# EAGLE board pihat-v2 (EAGLE 8.7.1)
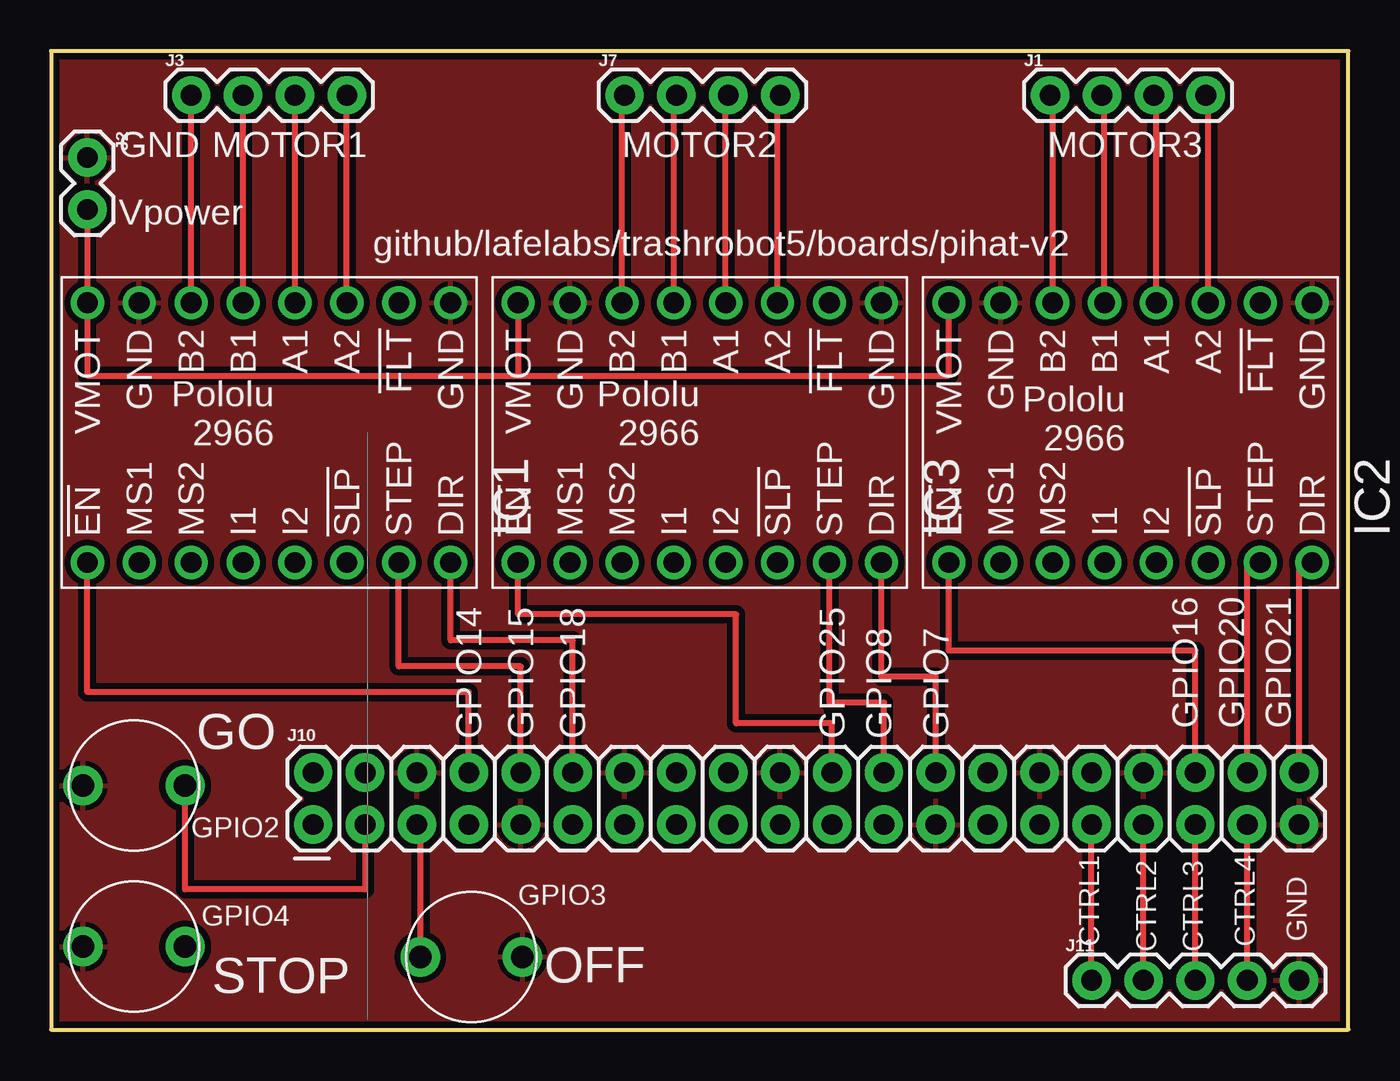
[diagram p0: board, top side]
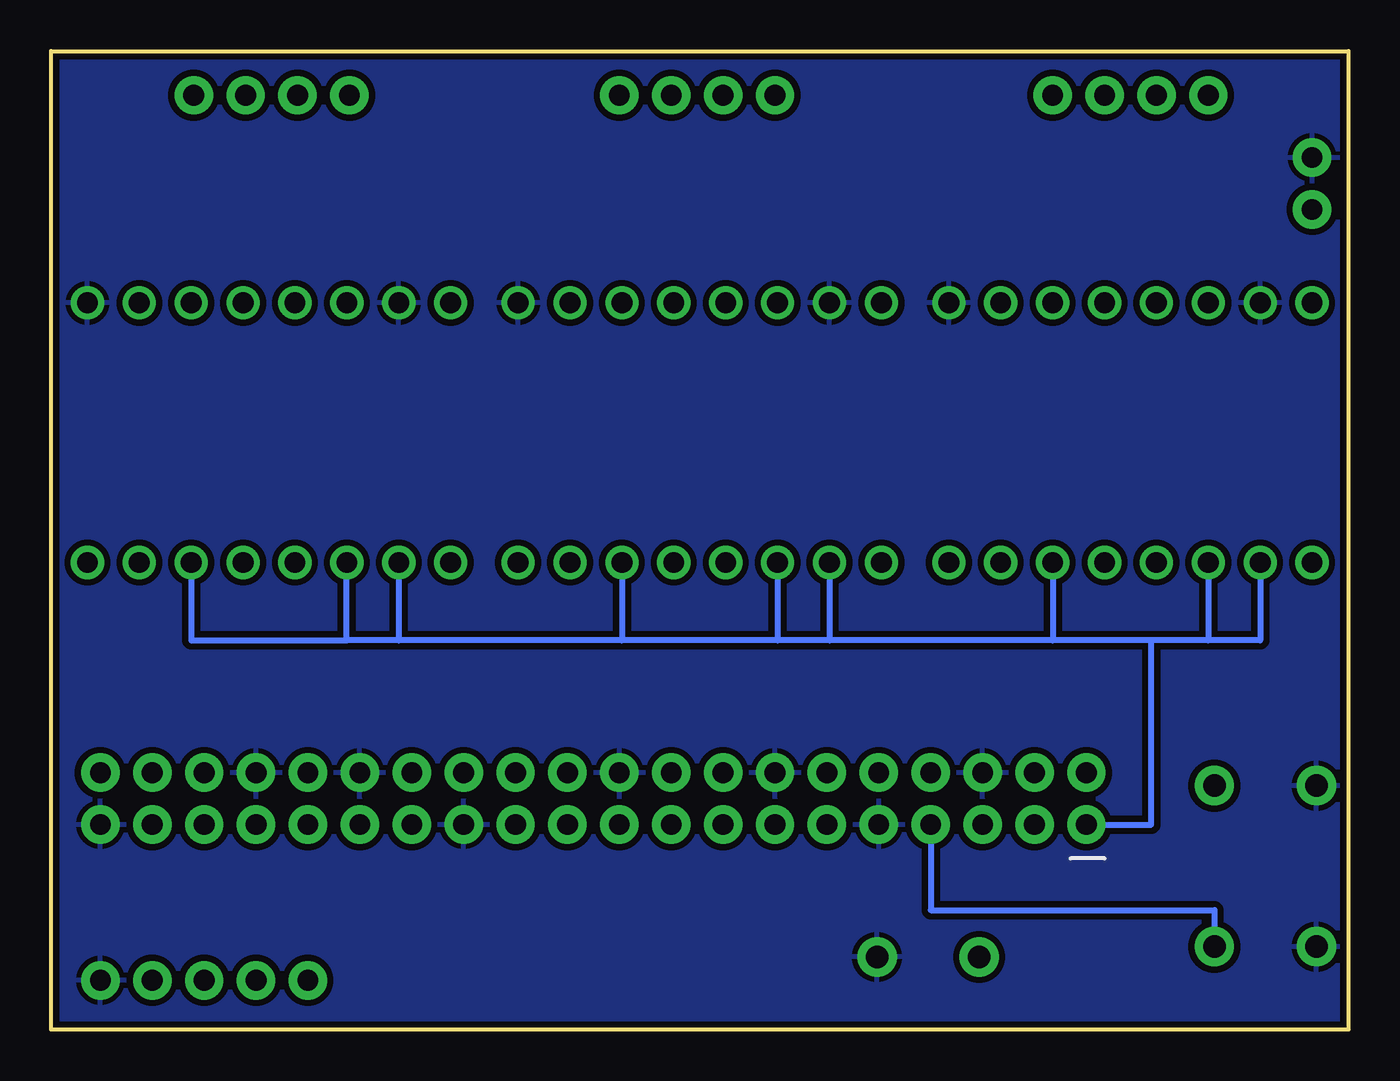
[diagram p1: board, bottom side, seen from below]

Size 63.5 x 47.88 mm. Coordinates in mm from the lower left corner, seen from the top.
Outline: 0,47.88 0,0 63.5,0 63.5,47.88 0,47.88
Copper layers (1*16): Top 0.035mm / dielectric 1.5mm / Bottom 0.035mm
Design rules "default": minimum track width 8mil, minimum drill 20mil, track to track 8mil, track to pad 8mil, pad to pad 8mil, via to via 8mil, smd to smd 8mil, copper to edge 10mil, drill to drill 8mil, minimum pad ring 12mil, minimum via ring 10mil, stop-mask expansion 4mil, vias tented up to drill 25mil, thermal gap 10mil
Net classes: 0 Default: width 0.178 mm; 1 vcc: width 0.178 mm

## Footprints (pad centres in the part's own frame; a part is rotated, then mirrored left to right if it is on the bottom)
MP6500 = drill 1.016: 1 -6.35,8.89; 2 -6.35,6.35; 3 -6.35,3.81; 4 -6.35,1.27; 5 -6.35,-1.27; 6 -6.35,-3.81; 7 -6.35,-6.35; 8 -6.35,-8.89; 9 6.35,-8.89; 10 6.35,-6.35; 11 6.35,-3.81; 12 6.35,-1.27; 13 6.35,1.27; 14 6.35,3.81; 15 6.35,6.35; 16 6.35,8.89
1X04 = drill 1.016 pad 1.88: 1 0,0; 2 2.54,0; 3 5.08,0; 4 7.62,0
1X02 = drill 1.016 pad 1.88: 1 0,0; 2 2.54,0
2X20 = drill 1.016 pad 1.88: 1 0,0; 2 0,2.54; 3 2.54,0; 4 2.54,2.54; 5 5.08,0; 6 5.08,2.54; 7 7.62,0; 8 7.62,2.54; 9 10.16,0; 10 10.16,2.54; 11 12.7,0; 12 12.7,2.54; 13 15.24,0; 14 15.24,2.54; 15 17.78,0; 16 17.78,2.54; 17 20.32,0; 18 20.32,2.54; 19 22.86,0; 20 22.86,2.54; 21 25.4,0; 22 25.4,2.54; 23 27.94,0; 24 27.94,2.54; 25 30.48,0; 26 30.48,2.54; 27 33.02,0; 28 33.02,2.54; 29 35.56,0; 30 35.56,2.54; 31 38.1,0; 32 38.1,2.54; 33 40.64,0; 34 40.64,2.54; 35 43.18,0; 36 43.18,2.54; 37 45.72,0; 38 45.72,2.54; 39 48.26,0; 40 48.26,2.54
1X05 = drill 1.016 pad 1.88: 1 0,0; 2 2.54,0; 3 5.08,0; 4 7.62,0; 5 10.16,0
BUTTON = drill 1.1 pad 1.93: P$1 -2.499,0; P$2 2.499,0

## Placement (x,y rotation side)
IC1  2967-MP6500  [MP6500]  10.67,29.21 90 top
IC2  2967-MP6500  [MP6500]  52.83,29.21 90 top
IC3  2967-MP6500  [MP6500]  31.75,29.21 90 top
J1  [1X04]  48.9,45.72 0 top
J2  [1X02]  1.78,42.67 270 top
J3  [1X04]  6.86,45.72 0 top
J7  [1X04]  28.07,45.72 0 top
J10  RASPBERRYPI-40-PIN-GPIO_PTH_NO_SHROUD  [2X20]  12.83,10.03 0 top
J11  [1X05]  50.93,2.41 0 top
U$1  BUTTON  [BUTTON]  4.06,4.06 180 top
U$4  BUTTON  [BUTTON]  4.06,11.94 180 top
U$5  BUTTON  [BUTTON]  20.57,3.56 0 top

## Library data of the parts
IC1-IC3 = pololu-stepper-driver
J1 J3 J7 = SparkFun-Connectors; PROD_ID: CONN-09696
J2 J10 J11 = SparkFun-Connectors
U$1 U$4 U$5 = spietz-library-2

## Nets
3.3V: IC1.2 IC1.3 IC1.6 IC2.2 IC2.3 IC2.6 IC3.2 IC3.3 IC3.6 J10.1
12V: IC1.16 IC2.16 IC3.16 J2.2
CONTROL1: J10.31 J11.1
CONTROL2: J10.33 J11.2
CONTROL3: J10.35 J11.3
CONTROL4: J10.37 J11.4
D5: J10.29
D12: J10.32
D17: J10.11
D22: J10.15
D23: J10.16
D24: J10.18
D27: J10.13
DIR1: IC1.8 J10.12
DIR2: IC3.8 J10.26
DIR3: IC2.8 J10.40
EN1: IC1.1 J10.8
EN2: IC3.1 J10.22
EN3: IC2.1 J10.36
GND [vcc]: IC1.9 IC1.15 IC2.9 IC2.15 IC3.9 IC3.15 J2.1 J10.6 J10.9 J10.14 J10.20 J10.25 J10.30 J10.34 J10.39 J11.5 U$1.P$2 U$4.P$2 U$5.P$2
GO-GPIO2: J10.3 U$4.P$1
GPIO1: J10.28
ID_SDA: J10.27
MISO: J10.21
MOSI: J10.19
N$1: IC3.14 J7.1
N$4: IC3.13 J7.2
N$5: IC1.14 J3.1
N$6: IC1.13 J3.2
N$7: IC1.12 J3.3
N$8: IC1.11 J3.4
N$9: IC2.14 J1.1
N$10: IC2.13 J1.2
N$11: IC2.12 J1.3
N$12: IC2.11 J1.4
N$13: IC3.12 J7.3
N$14: IC3.11 J7.4
N$15: J10.17
N$16: J10.2
N$17: J10.4
OFF-GPIO3: J10.5 U$5.P$1
SCK: J10.23
STEP1: IC1.7 J10.10
STEP2: IC3.7 J10.24
STEP3: IC2.7 J10.38
STOP: J10.7 U$1.P$1

## Tracks (layer width: path | path; a pad name or v marks a point on that pad's centre or on a via)
3.3V
  Bottom 0.305: IC2.6 56.64,19.05 49.02,19.05 | 49.02,19.05 IC2.3 | IC2.2 46.48,19.05 | 46.48,19.05 49.02,19.05 | IC3.6 35.56,19.05 | 35.56,19.05 46.48,19.05 | IC3.3 27.94,19.05 | 27.94,19.05 35.56,19.05 | IC3.2 25.4,19.05 | 25.4,19.05 27.94,19.05 | IC1.6 14.48,19.05 | 14.48,19.05 25.4,19.05 | IC1.3 6.86,19.05 | 6.86,19.05 9.65,19.05 | 9.65,19.05 14.48,19.05 | IC1.2 4.32,19.05 6.86,19.05 | J10.1 9.65,10.03 9.65,19.05
12V
  Top 0.305: J2.2 IC1.16 1.78,32 22.86,32 | 22.86,32 43.94,32 IC2.16 | IC3.16 22.86,32
CONTROL1
  Top 0.305: J11.1 J10.31
CONTROL2
  Top 0.305: J11.2 J10.33
CONTROL3
  Top 0.305: J11.3 J10.35
CONTROL4
  Top 0.305: J11.4 J10.37
DIR1
  Top 0.305: J10.12 25.53,19.05 19.56,19.05 IC1.8
DIR2
  Top 0.305: J10.26 43.31,17.27 40.64,17.27 IC3.8
DIR3
  Top 0.305: J10.40 61.09,22.86 IC2.8
EN1
  Top 0.305: J10.8 20.45,16.51 1.78,16.51 IC1.1
EN2
  Top 0.305: J10.22 38.23,14.99 33.53,14.99 33.53,20.32 22.86,20.32 IC3.1
EN3
  Top 0.305: J10.36 56.01,18.54 43.94,18.54 IC2.1
GND
  pour Top (isolate 0.305): -0.25,48.26 67.56,48.26 67.31,-0.76 -0.25,-0.25
  pour Bottom (isolate 0.305): -0.5,48.51 67.93,48.51 67.82,-0.51 -0.64,-0.51
GO-GPIO2
  Top 0.305: J10.3 15.37,6.86 6.56,6.86 U$4.P$1
N$1
  Top 0.305: IC3.14 27.94,45.72 J7.1
N$4
  Top 0.305: IC3.13 30.48,45.72 J7.2
N$5
  Top 0.305: IC1.14 J3.1
N$6
  Top 0.305: IC1.13 J3.2
N$7
  Top 0.305: IC1.12 J3.3
N$8
  Top 0.305: IC1.11 J3.4
N$9
  Top 0.305: IC2.14 49.02,45.72 J1.1
N$10
  Top 0.305: IC2.13 51.56,45.72 J1.2
N$11
  Top 0.305: IC2.12 54.1,45.72 J1.3
N$12
  Top 0.305: IC2.11 56.64,45.72 J1.4
N$13
  Top 0.305: IC3.12 33.02,45.72 J7.3
N$14
  Top 0.305: IC3.11 35.56,45.72 J7.4
OFF-GPIO3
  Top 0.305: U$5.P$1 18.07,10.03 J10.5
STEP1
  Top 0.305: J10.10 22.99,17.78 17.02,17.78 IC1.7
STEP2
  Top 0.305: J10.24 40.77,16 38.1,16 IC3.7
STEP3
  Top 0.305: J10.38 58.55,22.86 IC2.7
STOP
  Bottom 0.305: J10.7 20.45,5.84 6.56,5.84 U$1.P$1

## Text on the board
tPlace: GND | MOTOR1 | MOTOR2 | MOTOR3 | Vpower | github/lafelabs/trashrobot5/boards/pihat-v2 | Pololu / 2966 | Pololu / 2966 | Pololu / 2966 | GPIO16 | GPIO20 | GPIO21 | GO | GPIO14 | GPIO15 | GPIO18 | GPIO25 | GPIO8 | GPIO7 | GPIO2 | GPIO3 | GPIO4 | CTRL1 | CTRL2 | CTRL3 | CTRL4 | GND | STOP | OFF
tValues: Tent Vias! | Arduino Wee v1.3